# Altium PCB Плата печатная2.PcbDoc
Units mm, origin at the board's own origin, x right, y up, seen from the top; angles counter-clockwise.
Board outline 49.45 x 86.11 mm, 2 copper layers (Top Layer, Bottom Layer), stack 1.27 mm thick; 47 components, 42 nets, 151 pads, 22 vias.
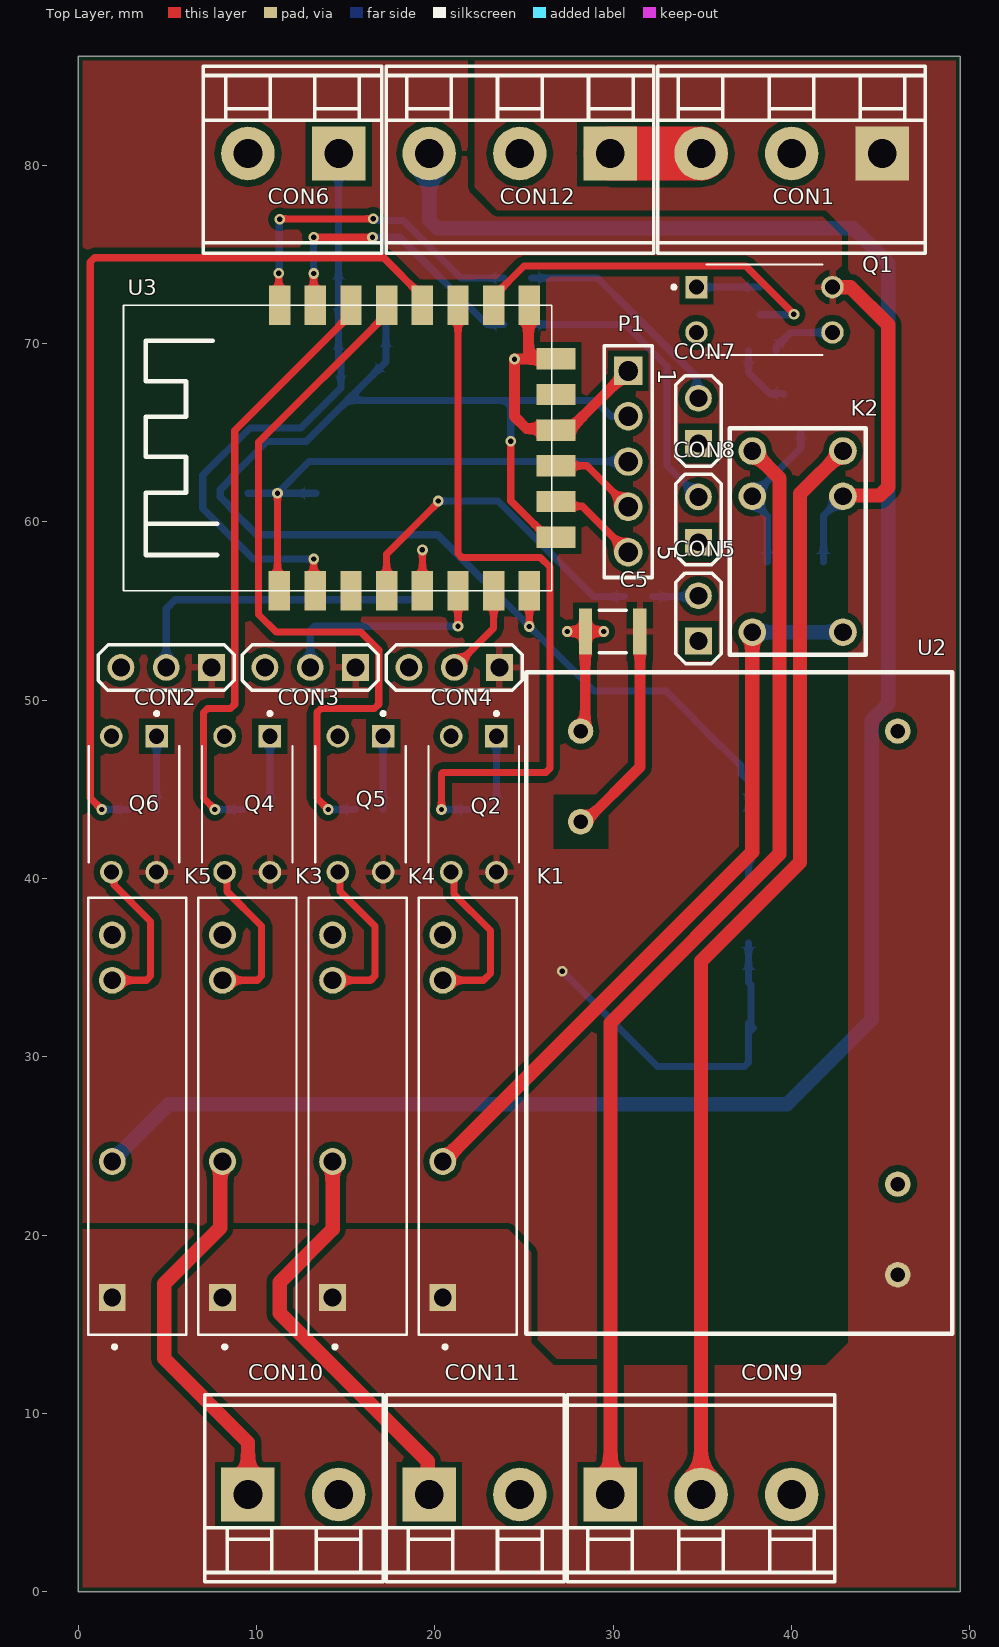
[diagram p0: Top Layer view]
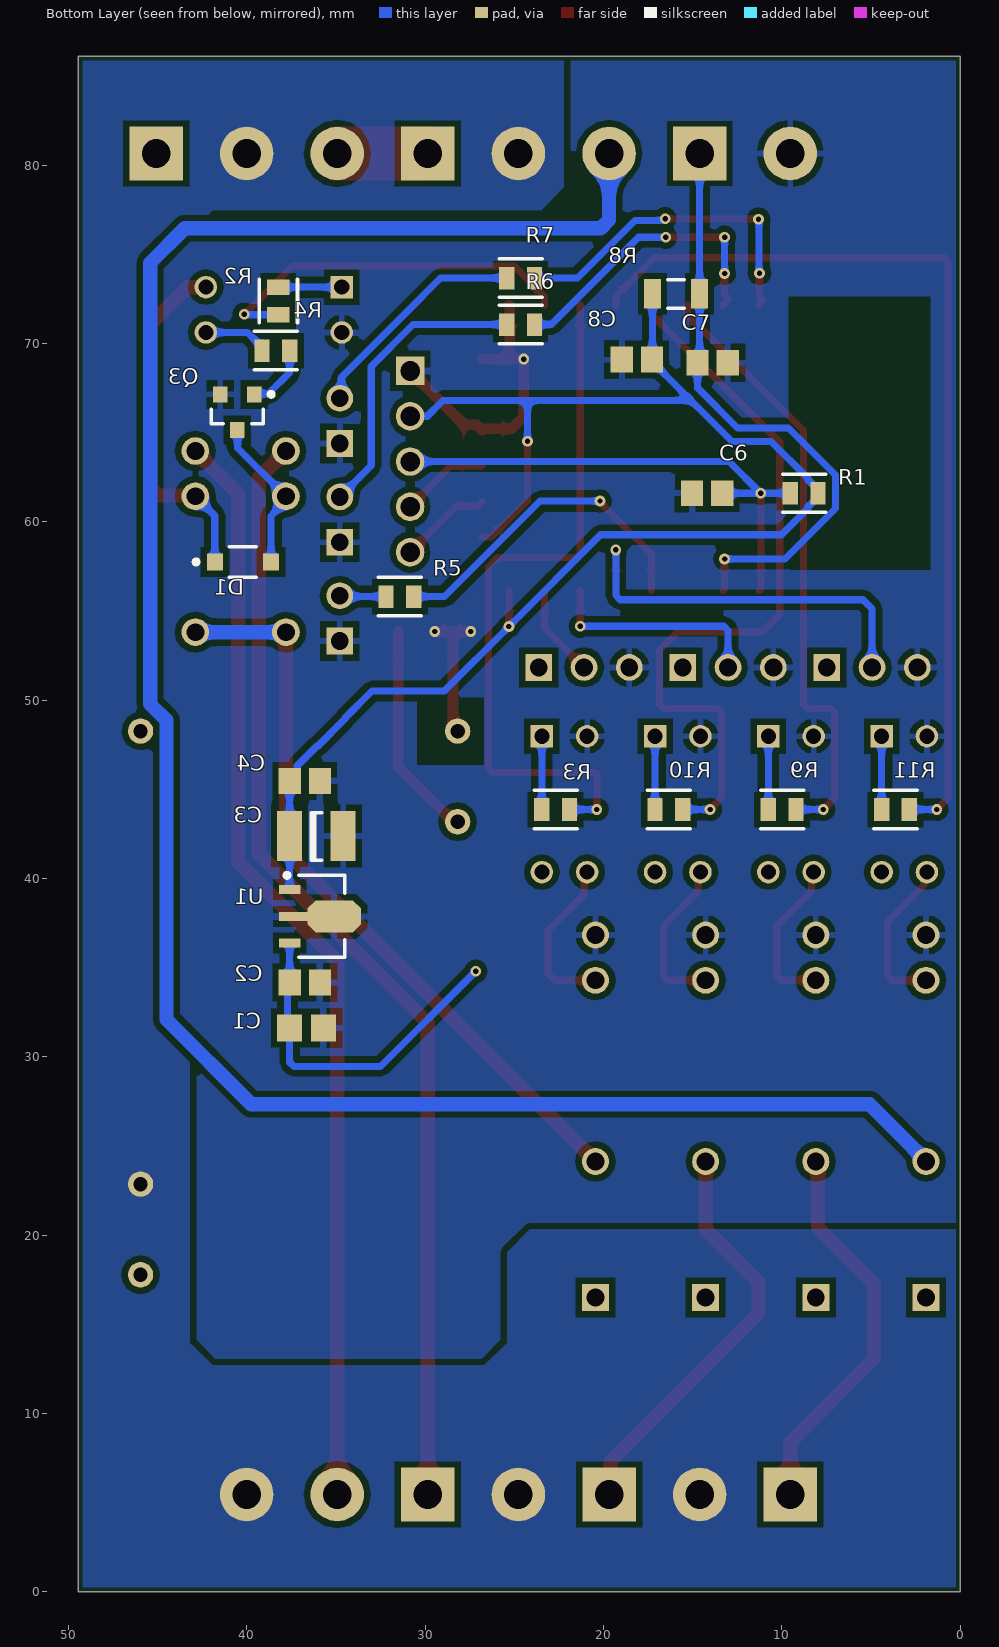
[diagram p1: Bottom Layer view, seen from below]
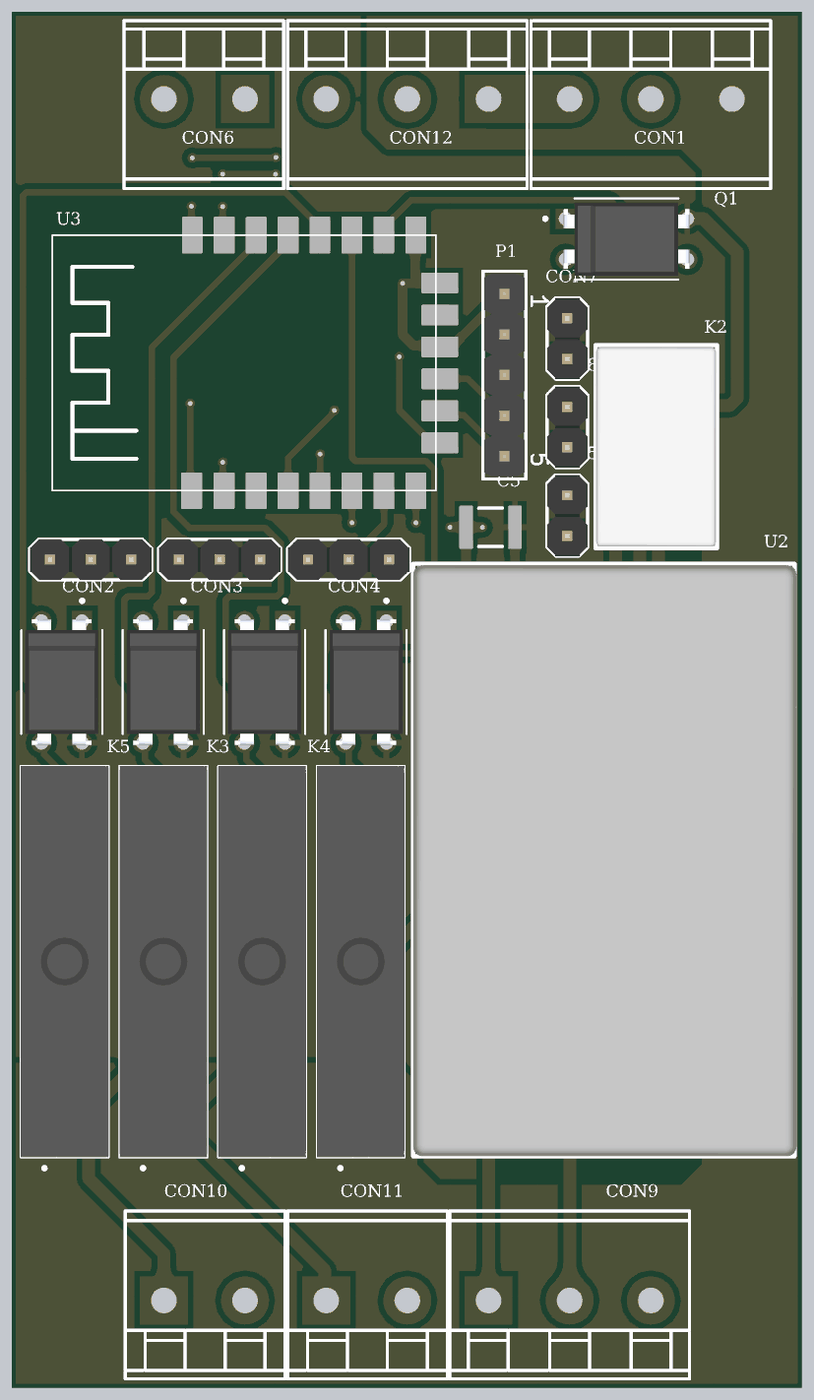
[diagram p2: 3D render of the assembled board from above, using the file's embedded part models]
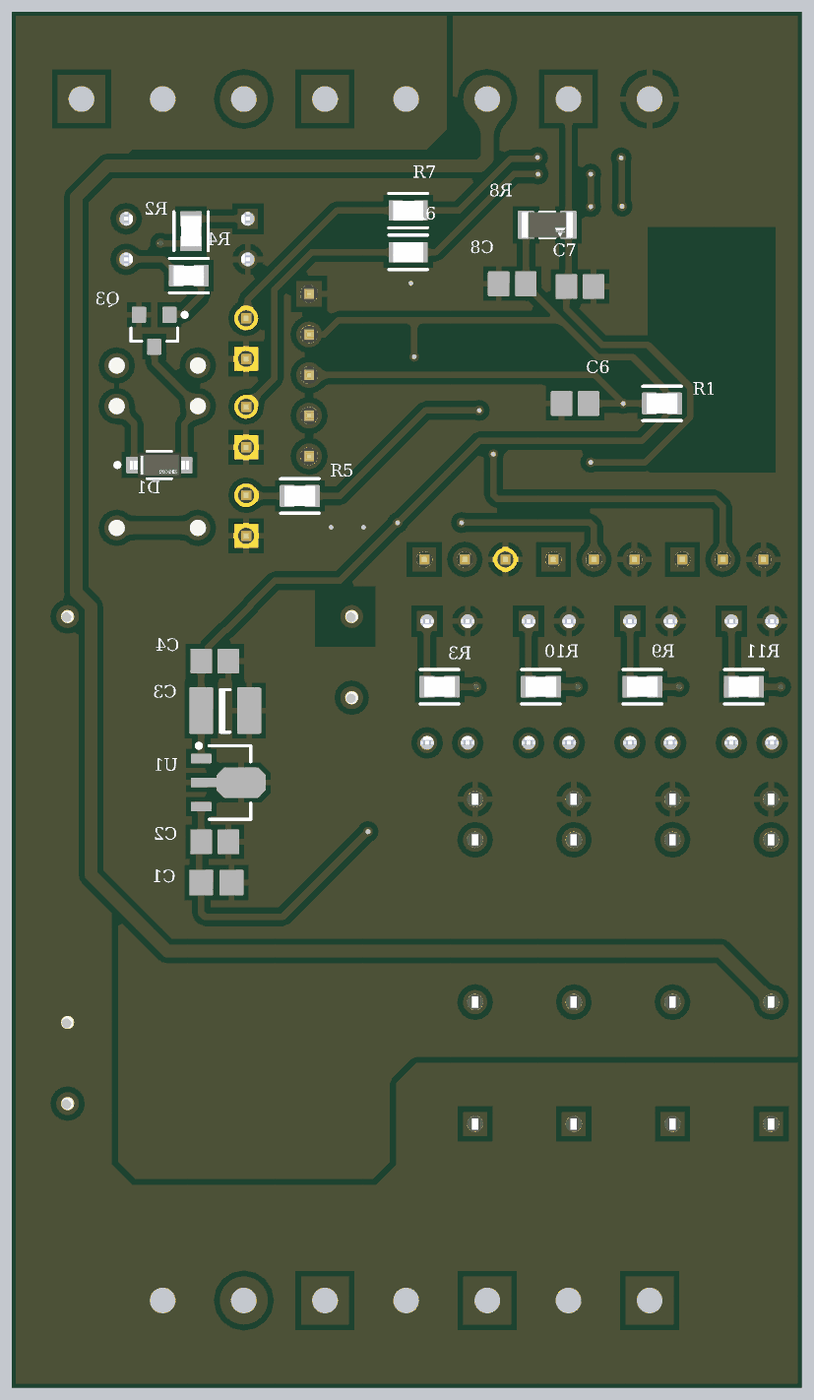
[diagram p3: 3D render of the assembled board from below, using the file's embedded part models]

## Layer stack, top to bottom
Top Solder: solder mask 0.0254, SM-001, Dk 4
Top Layer: signal copper 0.035
Dielectric 1: core 1.2, FR4, Dk 4.6
Bottom Layer: signal copper 0.035
Bottom Solder: solder mask 0.0254, SM-001, Dk 4

## Board outline
0,0 49.454,0 49.454,86.106 0,86.106

## Design rules (kind name [scope] priority, off if disabled: settings)
AcuteAngle [All] p1: minimum=3.50000000000000E+0001 checktracksonly=FALSE
BoardOutlineClearance "BoardOutlineClearance 1" [All] p1: gap=0.25 ignorepadtopadclearanceinfootprint=FALSE except(0: Arc-SplitContinuation Track-SplitContinuation SMDPad-SplitContinuation THPad-SplitContinuation Via-SplitContinuation Fill-SplitContinuation Poly-SplitContinuation Region-SplitContinuation Text-SplitContinuation) // Milling
BoardOutlineClearance "BoardOutlineClearance 2" [All] p2: gap=0.4 ignorepadtopadclearanceinfootprint=FALSE except(0: Arc-SplitContinuation Track-SplitContinuation SMDPad-SplitContinuation THPad-SplitContinuation Via-SplitContinuation Fill-SplitContinuation Poly-SplitContinuation Region-SplitContinuation Text-SplitContinuation) // V-Cut
Clearance "Clearance 3 Oz" [All] p1: gap=0.35 ignorepadtopadclearanceinfootprint=FALSE except(0.25: Arc-Hole Track-Hole SMDPad-Hole THPad-Hole Via-Hole Fill-Hole Poly-Hole Region-Hole Text-Hole)
Clearance "Clearance 2 Oz" [All] p2: gap=0.3 ignorepadtopadclearanceinfootprint=FALSE except(0.25: Arc-Hole Track-Hole SMDPad-Hole THPad-Hole Via-Hole Fill-Hole Poly-Hole Region-Hole Text-Hole)
Clearance "Clearance-1 1 Oz" [All] p3: gap=0.2 ignorepadtopadclearanceinfootprint=FALSE except(0.25: Arc-Hole Track-Hole SMDPad-Hole THPad-Hole Via-Hole Fill-Hole Poly-Hole Region-Hole Text-Hole) // Standart
Clearance "Clearance-2 1 Oz" [All] p4: gap=0.15 ignorepadtopadclearanceinfootprint=FALSE except(0.2: Arc-Fill Arc-Poly Track-Fill Track-Poly SMDPad-Fill SMDPad-Poly THPad-Fill THPad-Poly Via-Fill Via-Poly Fill-Fill Fill-Poly Poly-Poly; 0.25: Arc-Hole Track-Hole SMDPad-Hole THPad-Hole Via-Hole Fill-Hole Poly-Hole Region-Hole Text-Hole) // Advance
Clearance "Clearance-1 1/2 Oz" [All] p5: gap=0.125 ignorepadtopadclearanceinfootprint=FALSE except(0.2: Arc-Fill Arc-Poly Track-Fill Track-Poly SMDPad-SMDPad SMDPad-Fill SMDPad-Poly THPad-Fill THPad-Poly Via-Fill Via-Poly Fill-Fill Fill-Poly Poly-Poly Poly-Region Poly-Text; 0.25: Arc-Hole Track-Hole SMDPad-Hole THPad-Hole Via-Hole Fill-Hole Poly-Hole Region-Hole Text-Hole) // Standart
Clearance "Clearance-2 1/2 Oz" [All] p6: gap=0.1 ignorepadtopadclearanceinfootprint=FALSE except(0.15: Arc-Fill Arc-Poly Track-Fill Track-Poly SMDPad-SMDPad SMDPad-Fill SMDPad-Poly THPad-Fill THPad-Poly Via-Fill Via-Poly Fill-Fill Fill-Poly Poly-Poly Poly-Region Poly-Text; 0.25: Arc-Hole Track-Hole SMDPad-Hole THPad-Hole Via-Hole Fill-Hole Poly-Hole Region-Hole Text-Hole) // Advance
DiffPairsRouting "DiffPairsRouting 1 Oz" [All] p1: maxlimit=0.254 minlimit=0.2 mostfreqgap=0.254 toplayer_minwidth=0.2 toplayer_maxwidth=0.381 toplayer_prefwidth=0.381 bottomlayer_minwidth=0.2 bottomlayer_maxwidth=0.381 bottomlayer_prefwidth=0.381 maxuncoupledlength=12.7
DiffPairsRouting "DiffPairsRouting 1/2 Oz" [All] p2: maxlimit=0.254 minlimit=0.1 mostfreqgap=0.254 toplayer_minwidth=0.1 toplayer_maxwidth=0.381 toplayer_prefwidth=0.381 bottomlayer_minwidth=0.1 bottomlayer_maxwidth=0.381 bottomlayer_prefwidth=0.381 maxuncoupledlength=12.7
HoleSize "Minimum HoleSize" [IsPad] p1: absolutevalues=TRUE maxlimit=5.9 minlimit=0.6 maxpercent=80.000 minpercent=20.000
HoleSize "Minimum HoleSize VIA 1" [IsVia] p2: absolutevalues=TRUE maxlimit=5.9 minlimit=0.3 maxpercent=80.000 minpercent=20.000 // Standart
HoleSize "Minimum HoleSize VIA 2" [IsVia] p3: absolutevalues=TRUE maxlimit=5.9 minlimit=0.2 maxpercent=80.000 minpercent=20.000 // Advance
HoleToHoleClearance Hole2HoleClearance [All] p1: gap=0.25 allowstackedmicrovias=FALSE
MinimumAnnularRing "Minimum AR VIA Standart" [IsVia] p1: minimumring=0.15
MinimumAnnularRing "Minimum AR PAD Standart" [IsPAD] p2: minimumring=0.2
MinimumAnnularRing "Minimum AR VIA Advance" [IsVia] p3: minimumring=0.1
MinimumAnnularRing "Minimum AR PAD Advance" [IsPAD] p4: minimumring=0.15
MinimumSolderMaskSliver "SolderMask Bridge Standart" [All] p1: minsoldermaskwidth=0.15 // All Masks
MinimumSolderMaskSliver "SolderMask Bridge Advance" [All] p2: minsoldermaskwidth=0.1 // Mask LDI
PasteMaskExpansion [All] p1: expansion=0.05
PlaneClearance "PlaneClearance 3 Oz" [All] p1: clearance=0.35
PlaneClearance "PlaneClearance 2 Oz" [All] p2: clearance=0.3
PlaneClearance "PlaneClearance 1 Oz" [All] p3: clearance=0.2
PlaneClearance "PlaneClearance-1 1/2 Oz" [All] p4: clearance=0.2 // Standart
PlaneClearance "PlaneClearance-2 1/2 Oz" [All] p5: clearance=0.15 // Advance
PlaneConnect "TermalConnect 3 Oz" [All] p1: planeconnectstyle=Relief reliefexpansion=0.2 reliefentries=4 reliefconductorwidth=0.35 reliefairgap=0.35 // Standart
PlaneConnect "TermalConnect 2 Oz" [All] p2: planeconnectstyle=Relief reliefexpansion=0.2 reliefentries=4 reliefconductorwidth=0.3 reliefairgap=0.3 // Standart
PlaneConnect "TermalConnect-1 1 Oz" [All] p3: planeconnectstyle=Relief reliefexpansion=0.2 reliefentries=4 reliefconductorwidth=0.2 reliefairgap=0.2 // Standart
PlaneConnect "TermalConnect-2 1 Oz" [All] p4: pad.planeconnectstyle=Relief pad.reliefexpansion=0.15 pad.reliefentries=4 pad.reliefconductorwidth=0.2 pad.reliefairgap=0.2 via.planeconnectstyle=Direct via.reliefexpansion=0.15 via.reliefentries=4 via.reliefconductorwidth=0.15 via.reliefairgap=0.15 // Advance
PlaneConnect "TermalConnect-1 1/2 Oz" [All] p5: planeconnectstyle=Relief reliefexpansion=0.2 reliefentries=4 reliefconductorwidth=0.2 reliefairgap=0.2 // Standart
PlaneConnect "TermalConnect-2 1/2 Oz" [All] p6: pad.planeconnectstyle=Relief pad.reliefexpansion=0.15 pad.reliefentries=4 pad.reliefconductorwidth=0.15 pad.reliefairgap=0.15 via.planeconnectstyle=Direct via.reliefexpansion=0.15 via.reliefentries=4 via.reliefconductorwidth=0.15 via.reliefairgap=0.15 // Advance
PolygonConnect [InNet('220V(L)', '220V(N)')] p1: connectstyle=Direct reliefconductorwidth=0.254 reliefentries=4 polygonreliefangle="90 Angle" airgapwidth=0.254
PolygonConnect "PolygonConnect 3 Oz" [All] p2: thpad.connectstyle=Relief thpad.reliefconductorwidth=0.35 thpad.reliefentries=4 thpad.polygonreliefangle="90 Angle" thpad.airgapwidth=0.35 smdpad.connectstyle=Relief smdpad.reliefconductorwidth=0.35 smdpad.reliefentries=4 smdpad.polygonreliefangle="90 Angle" smdpad.airgapwidth=0.35 via.connectstyle=Direct via.reliefconductorwidth=0.254 via.reliefentries=4 via.polygonreliefangle="90 Angle" via.airgapwidth=0.254
PolygonConnect "PolygonConnect 2 Oz" [All] p3: thpad.connectstyle=Relief thpad.reliefconductorwidth=0.3 thpad.reliefentries=4 thpad.polygonreliefangle="90 Angle" thpad.airgapwidth=0.3 smdpad.connectstyle=Relief smdpad.reliefconductorwidth=0.3 smdpad.reliefentries=4 smdpad.polygonreliefangle="90 Angle" smdpad.airgapwidth=0.3 via.connectstyle=Direct via.reliefconductorwidth=0.254 via.reliefentries=4 via.polygonreliefangle="90 Angle" via.airgapwidth=0.254
PolygonConnect "PolygonConnect-1 1 Oz" [All] p4: thpad.connectstyle=Relief thpad.reliefconductorwidth=0.2 thpad.reliefentries=4 thpad.polygonreliefangle="90 Angle" thpad.airgapwidth=0.2 smdpad.connectstyle=Relief smdpad.reliefconductorwidth=0.2 smdpad.reliefentries=4 smdpad.polygonreliefangle="90 Angle" smdpad.airgapwidth=0.2 via.connectstyle=Direct via.reliefconductorwidth=0.254 via.reliefentries=4 via.polygonreliefangle="90 Angle" via.airgapwidth=0.254 // Standart
PolygonConnect "PolygonConnect-2 1 Oz" [All] p5: thpad.connectstyle=Relief thpad.reliefconductorwidth=0.15 thpad.reliefentries=4 thpad.polygonreliefangle="90 Angle" thpad.airgapwidth=0.15 smdpad.connectstyle=Relief smdpad.reliefconductorwidth=0.15 smdpad.reliefentries=4 smdpad.polygonreliefangle="90 Angle" smdpad.airgapwidth=0.15 via.connectstyle=Direct via.reliefconductorwidth=0.254 via.reliefentries=4 via.polygonreliefangle="90 Angle" via.airgapwidth=0.254 // Advance
PolygonConnect "PolygonConnect-1 1/2 Oz" [All] p6: thpad.connectstyle=Relief thpad.reliefconductorwidth=0.15 thpad.reliefentries=4 thpad.polygonreliefangle="90 Angle" thpad.airgapwidth=0.2 smdpad.connectstyle=Relief smdpad.reliefconductorwidth=0.2 smdpad.reliefentries=4 smdpad.polygonreliefangle="90 Angle" smdpad.airgapwidth=0.2 via.connectstyle=Direct via.reliefconductorwidth=0.254 via.reliefentries=4 via.polygonreliefangle="90 Angle" via.airgapwidth=0.254 // Standart
PolygonConnect "PolygonConnect-2 1/2 Oz" [All] p7: thpad.connectstyle=Relief thpad.reliefconductorwidth=0.125 thpad.reliefentries=4 thpad.polygonreliefangle="90 Angle" thpad.airgapwidth=0.15 smdpad.connectstyle=Relief smdpad.reliefconductorwidth=0.125 smdpad.reliefentries=4 smdpad.polygonreliefangle="90 Angle" smdpad.airgapwidth=0.15 via.connectstyle=Direct via.reliefconductorwidth=0.254 via.reliefentries=4 via.polygonreliefangle="90 Angle" via.airgapwidth=0.254 // Advance
RoutingCorners [All] p1 off: cornerstyle=45-Degree minsetback=2.54 maxsetback=2.54
RoutingVias [All] p1: holewidth=0.3 width=0.6 viastyle="Through Hole" minholewidth=0.2 minwidth=0.4 maxholewidth=5.9 maxwidth=6.4
SilkToSilkClearance Silk2SilkClearance [All] p1 off: silktosilkclearance=0.15
SilkToSolderMaskClearance Silk2SolderMaskClearance [IsPad] p1 off: minsilkscreentomaskgap=0.15 clearancetoexposedcopper=TRUE
SolderMaskExpansion SolderMaskExpansion-1 [All] p1: expansion=0.05 istentingtop=TRUE // Standart
UnRoutedNet [All] p1: checkbadconnections=TRUE
Width "Width 3 Oz" [All] p1: maxlimit=10 minlimit=0.35 preferedwidth=0.4 checkconnectedcopper=TRUE
Width "Width 2 Oz" [All] p2: maxlimit=10 minlimit=0.3 preferedwidth=0.35 minimp=50.000000 maximp=50.000000 favimp=50.000000 checkconnectedcopper=TRUE
Width "Width 1 Oz" [All] p3: maxlimit=10 minlimit=0.15 preferedwidth=0.2 checkconnectedcopper=TRUE
Width "Width 1/2 Oz" [All] p4: maxlimit=10 minlimit=0.1 preferedwidth=0.125 checkconnectedcopper=TRUE
19 further rules are at their usual default settings.

## Components (designator, comment, footprint, x,y, rotation, side; value= is the part's Value field where it differs from the comment)
C1 "10uF" CAPC2013X135X45ML10T25 36.642,31.614 r0 bottom
C2 "0.1uF" CAPC2013X140X45NL15T25 36.742,34.169 r0 bottom
C3 "1uF" TANTAL_B 36.092,42.377 r0 bottom
C4 "0.1uF" CAPC2013X140X45NL15T25 36.742,45.466 r0 bottom
C5 "47uF" MURA-1210_H_2.7_L 29.973,53.848 r0 top
C6 "0.1uF" CAPC2013X140X45NL15T25 14.185,61.595 r180 bottom
C7 "0.1uF" CAPC2013X140X45NL15T25 13.882,68.912 r0 bottom
C8 "0.1uF" CAPC2013X140X45NL15T25 18.122,69.088 r180 bottom
CON1 "DG129-5.08-3" DG129-5.08-3 40.005,80.645 r180 top
CON2 "PLS-03" PLS-03#1 4.941,51.831 r180 top
CON3 "PLS-03" PLS-03#1 13.015,51.831 r180 top
CON4 "PLS-03" PLS-03#2 21.089,51.831 r180 top
CON5 "PLS-02" PLS-02 34.78,54.583 r90 top
CON6 "DG129-5.08-2" DG129-5.08-2 9.525,80.645 r180 top
CON7 "PLS-02" PLS-02 34.78,65.652 r90 top
CON8 "PLS-02" PLS-02 34.78,60.117 r90 top
CON9 "DG129-5.08-3" DG129-5.08-3 34.925,5.461 r0 top
CON10 "DG129-5.08-2" DG129-5.08-2 14.605,5.461 r0 top
CON11 "DG129-5.08-2" DG129-5.08-2 24.765,5.461 r0 top
CON12 "DG129-5.08-3" DG129-5.08-3 24.765,80.645 r180 top
D1 "1N4148W-13-F" FP-SOD123-MFG 40.214,57.745 r180 bottom value=2pF
K1 "G3MB-202PDC5" RELAY_G3MB-202PDC5 21.847,26.67 r90 top
K2 "NRP-03K-C-05D-H" NRP-03K-C-05D-H 37.801,63.968 r270 top
K3 "G3MB-202PDC5" RELAY_G3MB-202PDC5 9.493,26.67 r90 top
K4 "G3MB-202PDC5" RELAY_G3MB-202PDC5 15.67,26.67 r90 top
K5 "G3MB-202PDC5" RELAY_G3MB-202PDC5 3.315,26.67 r90 top
P1 "61300511121" 61300511121 30.841,63.373 r270 top
Q1 "PC817C" DIP762W50P254L650H458Q4B 38.481,71.882 r0 top
Q2 "PC817C" DIP762W50P254L650H458Q4B 22.184,44.164 r270 top
Q3 "MMBT2222ALT3G" ONSC-SOT-23-3-318-08_V 40.529,66.143 r270 bottom
Q4 "PC817C" DIP762W50P254L650H458Q4B 9.484,44.164 r270 top
Q5 "PC817C" DIP762W50P254L650H458Q4B 15.834,44.164 r270 top
Q6 "PC817C" DIP762W50P254L650H458Q4B 3.134,44.164 r270 top
R1 "1k" FP-CR0805-IPC_C#1 8.748,61.595 r180 bottom
R2 "150" FP-CR0805-IPC_C#1 38.227,72.375 r90 bottom
R3 "150" FP-CR0805-IPC_C#1 22.677,43.866 r0 bottom
R4 "300" FP-CR0805-IPC_C#1 38.369,69.596 r180 bottom
R5 "100" FP-CR0805-IPC_C#1 31.419,55.803 r0 bottom
R6 "100" FP-CR0805-IPC_C#2 24.638,71.056 r0 bottom
R7 "100" FP-CR0805-IPC_C#2 24.638,73.66 r180 bottom
R8 "47k" FP-CRCW1206-e3-IPC_C 15.931,72.771 r180 bottom
R9 "150" FP-CR0805-IPC_C#1 9.977,43.866 r0 bottom
R10 "150" FP-CR0805-IPC_C#1 16.327,43.866 r0 bottom
R11 "150" FP-CR0805-IPC_C#1 3.627,43.866 r0 bottom
U1 "L78L33ABUTR" SOT-89_L 35.892,37.873 r180 bottom
U2 "IRM-03-5" footprint_IRM-03-5 45.954,17.78 r90 top
U3 "ZS3L" zs3l 19.05,64.135 r90 top

## Footprints (in the part's own frame and the unit in brackets; to place one, negate y for a bottom-side part, rotate by r counter-clockwise, add the part's x,y. Pads: shape width x height; smd on the part's side, far side on the other; paste and mask are expansions set on the pad)
61300511121 [mm] "Pin Header, pitch 2.54 mm, THT, Vertical, single row, 5p"
  rect 1.6x1.6 hole 1.1: 1(-5.08,0)
  round 1.6 hole 1.1: 2(-2.54,0) 3(0,0) 4(2.54,0) 5(5.08,0)
  silkscreen extent -6.5,-1.35 6.5,1.35, body extent -6.35,-1.27 6.35,1.27, height 8.57
CAPC2013X135X45ML10T25 [mm] "Chip Capacitor, 2-Leads, Body 2.10x1.35mm, IPC Low Density"
  rect 1.4x1.5 smd: 1(-0.95,0) 2(0.95,0)
  body extent -1.05,-0.67 1.05,0.67, height 1.35
CAPC2013X140X45NL15T25 [mm] "Chip Capacitor, 2-Leads, Body 2.00x1.25mm, IPC Medium Density"
  rect 1.25x1.45 smd: 1(-0.85,0) 2(0.85,0)
  body extent -1.08,-0.7 1.07,0.7, height 1.4
DG129-5.08-2 [mm]
  rect 3x3 hole 1.6: 1(-5.08,0)
  round 3 hole 1.6: 2(0,0)
  silkscreen extent -7.5,-4.9 2.5,5.6, body extent -8.23,-5.25 2.53,6.1, height 18
DG129-5.08-3 [mm]
  rect 3x3 hole 1.6: 1(-5.08,0)
  round 3 hole 1.6: 2(0,0) 3(5.08,0)
  silkscreen extent -7.5,-4.9 7.5,5.6, body extent -8.15,-5.33 7.69,6.03, height 18
DIP762W50P254L650H458Q4B [mm]
  rect 1.26x1.26 hole 0.85: 1(-3.81,1.27)
  round 1.26 hole 0.85: 2(-3.81,-1.27) 3(3.81,-1.27) 4(3.81,1.27)
  silkscreen extent -5.18,-2.54 3.25,2.54, body extent -3.94,-2.29 3.94,2.29, height 4.8
footprint_IRM-03-5 [mil]
  round 56 hole 31.5: +V(1000,700) -V(1200,700) AC/L(0,0) AC/N(200,0) NC(1200,0)
  silkscreen extent -130,-120 1330,820, body extent -130,-125 1327,820, height 591
FP-CR0805-IPC_C#1 [mm]
  rect 0.858x1.262 smd: 1(-0.777,0) 2(0.777,0)
  silkscreen extent -1.21,-1.07 1.21,1.07, body extent -1,-0.63 1,0.63, height 0.6
FP-CR0805-IPC_C#2 [mm]
  rect 0.858x1.262 smd paste+0 mask+0: 1(-0.777,0) 2(0.777,0)
  silkscreen extent -1.21,-1.07 1.21,1.07, body extent -1,-0.63 1,0.63, height 0.6
FP-CRCW1206-e3-IPC_C [mm]
  rect 0.956x1.658 smd: 1(-1.326,0) 2(1.326,0)
  silkscreen extent -0.47,-0.8 0.47,0.8, body extent -1.6,-0.8 1.6,0.8, height 0.6
FP-SOD123-MFG [mm]
  rect 0.9x0.95 smd: 1(-1.575,0) 2(1.575,0)
  silkscreen extent -2.75,-0.85 0.75,0.85, body extent -1.85,-0.77 1.85,0.77, height 1.45
MURA-1210_H_2.7_L [mm] "Chip Capacitor, 2-Leads, Body 3.5x2.7mm, IPC High Density"
  rect 0.75x2.6 smd: 1(-1.525,0) 2(1.525,0)
  silkscreen extent -0.75,-1.2 0.75,1.2, body extent -1.75,-1.35 1.75,1.35, height 2.7
NRP-03K-C-05D-H [mm]
  round 1.55 hole 1: 1(2.54,5.08) 2(2.54,0) 3(0,0) 4(10.16,5.08) 5(10.16,0) 6(0,5.08)
  silkscreen extent -1.27,-1.27 11.43,6.35, body extent -1.17,-1.22 11.33,6.28, height 10
ONSC-SOT-23-3-318-08_V [mm] "SOT23, 3-Leads, Body 2.92x1.3mm, Pitch 0.95mm"
  rect 0.9x0.8 smd: 1(-1,0.95) 2(-1,-0.95) 3(1,0)
  silkscreen extent -1.12,-1.46 0.65,2.02, body extent -0.65,-1.46 0.65,1.46, height 1.11
PLS-02 [mm]
  rect 1.5x1.5 hole 1 paste-0.05 mask+0.05: 1(-1.27,0)
  round 1.5 hole 1 paste-0.05 mask+0.05: 2(1.27,0)
  silkscreen extent -2.54,-1.27 2.54,1.27, body extent -2.54,-1.27 2.54,1.27, height 8.6
PLS-03#1 [mm]
  rect 1.5x1.5 hole 1: 1(-2.54,0)
  round 1.5 hole 1: 2(0,0) 3(2.54,0)
  silkscreen extent -3.81,-1.27 3.81,1.27, body extent -3.81,-1.27 3.81,1.27, height 8.6
PLS-03#2 [mm]
  rect 1.5x1.5 hole 1 paste-0.05: 1(-2.54,0)
  round 1.5 hole 1 paste-0.05: 2(0,0)
  round 1.5 hole 1 paste-0.05 mask+0.05: 3(2.54,0)
  silkscreen extent -3.81,-1.27 3.81,1.27, body extent -3.81,-1.27 3.81,1.27, height 8.6
RELAY_G3MB-202PDC5 [mm]
  rect 1.508x1.508 hole 1: 1(-10.16,1.4)
  round 1.508 hole 1: 2(-2.54,1.4) 3(7.62,1.4) 4(10.16,1.4)
  silkscreen extent -13.03,-2.75 12.25,2.75, body extent -12.25,-2.75 12.25,2.75, height 20.5
SOT-89_L [mm] "SOT89, 3-Leads, Body 4.5x2.4 mm, Pitch 1.5mm, Lead Span 4.1mm, IPC High Density"
  rect 1.2x0.5 smd: 1(-1.7,1.5) 3(-1.7,-1.5)
  rect 1.6x0.5 smd: 2(-1.5,0)
  oct 3x1.8 smd: 2(0.8,0)
  silkscreen extent -1.98,-2.3 1.4,2.42, body extent -1.2,-2.3 1.4,2.3, height 1.6
TANTAL_B [mm]
  rect 1.4x2.8 smd: 1(1.5,0) 2(-1.5,0)
  silkscreen extent -0.3,-1.35 0.3,1.35, body extent -1.75,-1.4 1.75,1.4, height 1.9
zs3l [mm]
  rect 2.2x1.2 smd: 1(-8,7.782) 2(-8,5.75) 3(-8,3.75) 4(-8,1.75) 5(-8,-0.25) 6(-8,-2.25) 7(-8,-4.25) 8(-8,-6.25) 15(8,-6.25) 16(8,-4.25) 17(8,-2.25) 18(8,-0.25) 19(8,1.75) 20(8,3.75) 21(8,5.75) 22(8,7.75)
  rect 1.2x2.2 smd: 9(-5,-7.75) 10(-3,-7.75) 11(-1,-7.75) 12(1,-7.75) 13(3,-7.75) 14(5,-7.75)
  silkscreen extent -8,-7.5 8,16.5

## Part data
C1: library part CMP-2000-04946-1, "GRM21BR61E106KA73L / 10uF, +/- 10%, 25 V, 0805", Capacitance=1µF, Case Size/Dimension=0805, Dielectric=X7R, Manufacturer=Murata, Package Description="2-Pin Surface Mount Device, Body 2 x 1.25 mm", Package Reference=805, Rated Voltage=16V, Tolerance (%)=±10%, Datasheet URL=https://datasheet.ciiva.com/34302/1858922-34302874.pdf, Datasheet Version=Mar-08, Manufacturer URL=http://www.murata.com/
C2 C4 C6 C7 C8: library part CMP-2007-03401-1, "GRM21BR71H104K / 0.1 мкФ X7R 10% 50В 0805", Manufacturer=Murata, Part Number=GRM21BR71C475KA73L
C3: library part _TANTAL-B, "TANTAL TECAP1/50V B, 10%", Lifetime @ Temp=2000Hrs@105℃, Assembly type="Manual Part", Note="Tantalum Capacitors", Publisher="Catcatcat Electronics", website developer=http://catcatcat.d-lan.dp.ua/
C5: library part CMP-2000-06362-1, "Cap Ceramic, 47 uF, +/- 10%, -55 to 85 degC, 2-Pin SMD (1210), RoHS, Tape and Reel", Capacitance=47µF, Manufacturer=Murata, Operating Temperature=-55°C~85°C, Package / Case=1210(3225Metric), Package Description="2-Pin Surface Mount Device, Body 3.2 x 2.5 mm", Package Reference=1210, Ratings=-, Standard Package=1, Temperature Coefficient=X5R, Tolerance=±10%, Voltage - Rated=16V, Applications=GeneralPurpose, Catalog Drawings=GRMSeries_1210_2.5, Category=Capacitors, Datasheet URL=http://psearch.en.murata.com/capacitor/product/GRM32ER61C476KE15%23.pdf, Datasheet Version=04/2016, Family=CeramicCapacitors, Features=-, Height - Seated (Max)=-, Lead Spacing=-, Lead Style=-, Manufacturer URL=http://www.murata.com/, Mounting Technology=SurfaceMount, Mounting Type=SurfaceMount,MLCC, Online Catalog=GRMSeries, Other Names=490-6539-6, Packaging=Digi-Reel®, Product Training Modules=High-CapMultilayerCeramicCapacitors, Series=GRM, Size / Dimension="0.126\"Lx0.098\"W(3.20mmx2.50mm)", Thickness (Max)="0.106\"(2.70mm)", Voltage Rating DC=16V
CON1 CON6 CON9 CON10 CON11 CON12: Temp.Characteristic="-40C to +85C", Assembly type="Manual Part", Note=Connector, Publisher="Catcatcat Electronics", website developer=http://catcatcat.d-lan.dp.ua/
CON2 CON3 CON4 CON5 CON7 CON8: "2.54 mm", Temp.Characteristic="-40C to +85C", Assembly type="Manual Part", Note=Connector, Publisher="Catcatcat Electronics", website developer=http://catcatcat.d-lan.dp.ua/
D1: library part CMP-12791-000005-1, "DIODE GEN PURP 100V 150MA SOD123", Capacitance=2pF, Forward Current=300mA, Manufacturer="Diodes Inc.", Max Junction Temp=+150°C, Max Repetitive Reverse Voltage=100V, Max Surge Forward Current=1A, Package=SOD123, Peak Reverse Current=1uA, Temperature="-65°C to +150°C", Temperature Range Low=-65°C, Automotive=No, Category=Diode, ComponentLink2Description=Datasheet, ComponentLink2URL=https://upverter.com/datasheet/628e7d6fee5901eee6eef4567d1c3569f2cd3cde.pdf, Device Class L1="Discrete Semiconductors", Device Class L2=Diodes, Device Class L3="Rectifier Diodes", Digikey Description="DIODE GEN PURP 100V 150MA SOD123", Footprint Url=https://www.diodes.com/assets/Package-Files/SOD123.pdf, Height=1.45mm, Lead Free=Yes, Manufacturer Part Number=1N4148W-13-F, Mouser Description="1N4148W Series 2 A 100 V 400 mW Surface Mount Fast Switching Diode - SOD-123", Octopart=https://octopart.com/1n4148w-13-f-diodes+inc.-2359612, Reverse Voltage=100V, RoHS=TRUE, Standoff Height=0mm, Temperature Range High=+150°C
K1 K3 K4 K5: Package=None, Availability=Unavailable, MF="{'manufacturer': u'Omron Automation'}", MP=G3MB-202PDC5, Price=None
P1: library part CMP-1502-01068-1, "THT Vertical Pin Header WR-PHD, Pitch 2.54 mm, Single Row, 5 pins", Contact Resistance=20mOhm, Manufacturer="Wurth Elektronik", Operating Temperature=-40to105degC, Rated Current=3A, Withstanding Voltage=500VAC, Working Voltage=250VAC, Datasheet URL=https://katalog.we-online.de/em/datasheet/6130xx11121.pdf, Gender=Male, Manufacturer URL=http://www.we-online.de, Mounting Technology=THT, Orientation=Vertical, Package Reference=61300511121, Packaging=Bag, Part Number=61300511121, Pin Number=5, Pitch=2.54mm, Publisher=WurthElektronik, Row Number=Single
Q1 Q2 Q4 Q5 Q6: "High Density Mounting Type Photocoupler", Package=None, Availability=Unavailable, MF="{'manufacturer': u'Taiwan Semiconductor'}", MP=PC817C, Price=None
Q3: library part CMP-1048-00592-1, "General Purpose Transistor, NPN Silicon, 3-Pin SOT-23, Pb-Free, Tape and Reel", Manufacturer="On Semiconductor", ComponentLink1Description="Manufacturer URL", ComponentLink1URL=http://www.onsemi.com/, ComponentLink2Description=Datasheet, ComponentLink2URL=http://www.onsemi.cn/pub_link/Collateral/MMBT2222LT1-D.PDF, ComponentLink3Description="Package Specification", ComponentLink3URL=http://www.onsemi.cn/pub_link/Collateral/318-08.PDF, DatasheetVersion="Rev. 10", fT Min (MHz)=300, IC Continuous (A)=0.6, Mounting Technology="Surface Mount", PackageDescription="3-Pin Small Outline Transistor, Body 2.92 x 1.3 mm, Pitch 0.95 mm", PackageReference=SOT-23-3-318-08, PackageVersion="Rev. AP, 11/2009", Packing="Tape and Reel", PartNumber=MMBT2222ALT3G, Polarity=NPN, RoHS=TRUE
R1 R2 R3 R5 R6 R7 R9 R10 R11: library part CMP-07231-005922-1, "0805 150Ω 0.125W 1%", Case Code (Imperial)=0805, Case Code (Metric)=2012, Max Operating Temperature=155°C, Max Power Dissipation=125mW, Min Operating Temperature=-55°C, Package Quantity=1, Resistance=300kR, Temperature Coefficient=100ppm/°C, Tolerance=1%, Voltage Rating=150V, Case/Package=0805, Composition="Thick Film", Contact Plating=Tin, Depth=1.25mm, Features="Moisture Resistant", Height=0.024inch, Length=2mm, Military Standard=Not, Mount="Surface Mount", Number of Terminations=2, Packaging="Tape and Reel", Power Rating=125mW, Radiation Hardening=No, Termination=SMD/SMT, Thickness=508um, Width=0.049inch
R4: library part CMP-07231-005922-1, "0805 300kΩ 0.125W 1%", Case Code (Imperial)=0805, Case Code (Metric)=2012, Max Operating Temperature=155°C, Max Power Dissipation=125mW, Min Operating Temperature=-55°C, Package Quantity=1, Resistance=300kR, Temperature Coefficient=100ppm/°C, Tolerance=1%, Voltage Rating=150V, Case/Package=0805, Composition="Thick Film", Contact Plating=Tin, Depth=1.25mm, Features="Moisture Resistant", Height=0.024inch, Length=2mm, Military Standard=Not, Mount="Surface Mount", Number of Terminations=2, Packaging="Tape and Reel", Power Rating=125mW, Radiation Hardening=No, Termination=SMD/SMT, Thickness=508um, Width=0.049inch
R8: library part CMP-2003-04807-2, "10kΩ, 1%, 0.25W 1206", Case Code (Imperial)=1206, Case Code (Metric)=3216, Max Operating Temperature=155°C, Max Power Dissipation=250mW, Min Operating Temperature=-55°C, Package Quantity=10, Resistance=10kR, Temperature Coefficient=100ppm/°C, Tolerance=1%, Voltage Rating=200V, Case/Package=1206, Composition="Thick Film", Contact Plating=Tin, Depth=1.6mm, Features="Automotive AEC-Q200", Height=0.55mm, Lead Free="Lead Free", Length=3.2mm, Military Standard=Not, Number of Pins=2, Number of Terminations=2, Packaging="Tape and Reel", Power Rating=250mW, Radiation Hardening=No, Termination=SMD/SMT, Voltage Rating (DC)=200V, Weight=0.000353oz, Width=0.063inch, Working Voltage=200V
U1: library part CMP-0244-00410-1, "Positive Voltage Regulator, 3.3V, 4-Pin SOT-89, Tape and Reel https://www.chipdip.ru/product/l78l33abutr", ComponentLink1Description="Manufacturer URL", ComponentLink1URL=https://www.chipdip.ru/product/l78l33abutr, ComponentLink2Description=Datasheet, ComponentLink2URL=http://www.st.com/internet/com/TECHNICAL_RESOURCES/TECHNICAL_LITERATURE/DATASHEET/CD00000446.pdf, DatasheetVersion=1/02/2011, PackageDescription="3-Pin SOT-89 Package 1.5 mm Pitch, 4.1 mm Lead Span", PackageReference=SOT-89, PackageVersion=2011
U2: "AC-DC Single output Encapsulated power supply; Output 5Vdc at 0.6A; PCB mount, miniature size", Package=None, Availability=Unavailable, MF="{'manufacturer': u'MEAN WELL'}", MP=IRM-03-5, Price=None
U3: library part ZS3l, "ZS3L module on chip EFR32MG21A020F768IM32"

## Via types
v1: diameter 0.6, hole 0.3, Top Layer to Bottom Layer, tented both sides, 22 vias

## Nets (pads, with @x,y where several pads share a name; then routed paths per layer and width w, separated by ;. In a path a pad name is that pad's centre, name@x,y a point inside that pad or via, vN(x,y) a via of type N, cw(c..) or ccw(c..) an arc to the next point about the centre after c; other vN are vias at no path point)
220V(L): CON1.1 K1.1 K3.1 K4.1 K5.1 U2.AC/L
220V(N): CON1.2 CON9.3 CON10.2 CON11.2 CON12.2 U2.AC/N
+3.3V: C3.1 C4.2 C8.2 P1.2 R1.2 R8.1 U1.1 U3.8 U3.9 | length 85.5
  Top Layer w0.4: v1(24.257,64.516) 24.257,61.178 26.3,59.135 U3.9 ; v1(25.3,54.129) U3.8
  Bottom Layer w0.4: R8.1 17.257,69.103 C8.2 17.272,68.988 15.086,66.802 ; v1(24.257,64.516) 24.257,66.802 ; P1.2@30.079,65.913 29.877,65.913 28.988,66.802 24.257,66.802 ; U1.1 C3.1 C4.2 37.167,45.891 37.167,46.319 36.075,47.411 36.022,47.411 34.5,48.933 34.5,48.986 32.977,50.508 28.921,50.508 v1(25.3,54.129) 20.159,59.27 10.012,59.27 8.546,60.736 8.546,60.818 7.971,61.393 R1.2 7.971,61.797 8.546,62.372 8.546,62.454 10.599,64.507 12.791,64.507 15.086,66.802 ; 15.086,66.802 24.257,66.802
+5V: C1.2 C2.2 C5.2 CON2.1 CON3.1 CON4.1 D1.1 K2.1 Q1.4 Q2.4 Q4.4 Q5.4 Q6.4 U1.3 U2.+V | length 52.2
  Top Layer w0.6: U2.+V@28.428,43.18 31.498,46.25 C5.2
  Top Layer w0.8: Q1.4 43.307,73.152 45.415,71.044 45.415,61.937 44.947,61.468 42.921,61.468 K2.1
  Bottom Layer w0.4: v1(27.153,34.798) 27.158,34.798 32.492,29.464 37.358,29.464 37.592,29.698 C1.2 ; U1.3 C2.2 37.719,34.042 C1.2@37.719,31.889 ; D1.1 41.789,60.336 K2.1 ; C1.2 37.592,31.889 37.858,31.623 37.721,31.486 C1.2
ACT_EN_1: R9.1 U3.20 | length 34.2
  Top Layer w0.4: v1(7.671,43.866) 7.034,44.503 7.034,49.296 7.268,49.53 8.546,49.53 8.781,49.764 8.781,65.116 15.3,71.635 U3.20
  Bottom Layer w0.4: v1(7.671,43.866) R9.1
ACT_EN_2: R10.1 U3.19 | length 41.8
  Top Layer w0.4: v1(14.021,43.866) 13.384,44.503 13.384,49.296 13.618,49.53 16.62,49.53 16.855,49.764 16.855,52.808 15.855,53.808 11.117,53.808 10.118,54.807 10.118,64.453 17.3,71.635 U3.19
  Bottom Layer w0.4: v1(14.021,43.866) R10.1
GND_AC: CON1.3 CON12.1 | length 5.1
  Top Layer w3: CON12.1 CON1.3
GND_DC: C1.1 C2.1 C3.2 C4.1 C5.1 C6.1 C7.1 C8.1 CON2.3 CON3.3 CON4.3 CON5.1 CON6.2 CON7.1 CON8.1 K1.4 K3.4 K4.4 K5.4 P1.1 Q1.2 Q2.2 Q3.2 Q4.2 Q5.2 Q6.2 U1.2 U2.-V U3.12 U3.14 U3.15 | length 24.3
  Top Layer w0.4: U2.-V@28.428,48.26 U2.-V@28.438,48.27 ; C5.1@28.438,53.838 C5.1
  Top Layer w0.6: U3.15 25.257,72.092 25.257,69.106 ; U3.14 26.771,69.106 25.257,69.106 ; v1(27.432,53.848) C5.1 v1(29.464,53.848) ; U2.-V@28.438,48.27 C5.1@28.438,53.838 ; P1.1 27.823,65.435 27.1,65.435 U3.12 26.716,65.219 25.151,65.219 24.468,65.902 v1(24.468,69.118) 25.245,69.118 25.257,69.106
LED_1: R5.1 U3.4 | length 18.9
  Top Layer w0.4: U3.4 17.3,58.194 20.093,60.987 20.093,61.06 v1(20.193,61.16)
  Bottom Layer w0.4: v1(20.193,61.16) 23.549,61.16 28.906,55.803 R5.1
LED_2: R7.2 U3.22 | length 19
  Top Layer w0.4: v1@11.258,73.942 v1(11.251,73.935) 11.251,72.588 11.049,72.386 U3.22 ; v1(11.303,76.962) 11.319,76.978 16.526,76.978 v1(16.542,76.994)
  Bottom Layer w0.4: v1(11.251,73.935) 11.277,73.961 11.277,76.936 v1(11.303,76.962) ; v1(16.542,76.994) 16.596,76.994 16.696,76.894 18.229,76.894 21.463,73.66 R7.2
LED_3: R6.1 U3.21 | length 16.7
  Top Layer w0.4: v1(13.208,73.914) 13.208,72.735 12.954,72.481 U3.21 ; v1(13.208,75.946) v1(16.51,75.946)
  Bottom Layer w0.4: v1(13.208,73.914) v1(13.208,75.946) ; v1(16.51,75.946) 18.034,75.946 22.924,71.056 R6.1
MIXER_DIR: R2.1 U3.16 | length 21.1
  Top Layer w0.4: U3.16 23.3,72.635 24.997,74.332 37.428,74.332 v1(40.132,71.628)
  Bottom Layer w0.4: R2.1 38.234,71.606 40.11,71.606 v1(40.132,71.628)
MIXER_DO: R3.1 U3.17 | length 40.4
  Top Layer w0.4: v1(20.371,43.866) 20.371,45.873 20.438,45.94 26.216,45.94 26.45,46.174 26.45,57.463 25.928,57.985 21.534,57.985 21.3,58.219 U3.17
  Bottom Layer w0.4: v1(20.371,43.866) R3.1
NetCON5_2: CON5.2 R5.2 | length 2.6
  Bottom Layer w0.4: R5.2 CON5.2@34.729,55.803
  Bottom Layer w0.6: CON5.2@34.729,55.803 CON5.2
NetCON7_2: CON7.2 R7.1 | length 12.8
  Bottom Layer w0.4: R7.1 29.128,73.66 30.982,71.806 34.682,68.105 34.682,67.019 CON7.2
NetCON8_2: CON8.2 R6.2 | length 16.6
  Bottom Layer w0.4: R6.2 30.671,71.056 33.02,68.707 33.02,63.147 CON8.2
NetCON9_1: CON9.1 K2.3 | length 63.1
  Top Layer w0.8: CON9.1 29.845,31.902 39.326,41.382 39.326,62.443 K2.3
NetCON9_2: CON9.2 K2.6 | length 61.8
  Top Layer w0.8: CON9.2 34.925,35.355 40.476,40.906 40.476,61.563 K2.6
NetCON10_1: CON10.1 K3.2 | length 21.9
  Top Layer w0.8: K3.2@7.966,24.13 7.966,20.412 4.826,17.272 4.826,13.081 9.525,8.382 CON10.1
NetCON11_1: CON11.1 K4.2 | length 23.5
  Top Layer w0.8: K4.2 14.27,20.331 11.303,17.364 11.303,15.621 19.597,7.327 CON11.1@19.597,5.334
NetCON12_3: CON12.3 K5.2 | length 119.2
  Bottom Layer w0.8: K5.2 1.915,24.171 5.08,27.336 39.741,27.336 44.493,32.088 44.493,48.865 45.415,49.787 45.415,74.512 43.473,76.454 20.154,76.454 19.685,76.923 CON12.3
NetD1_2: D1.2 K2.2 Q3.3 | length 8.9
  Bottom Layer w0.4: D1.2 38.639,60.321 37.801,61.159 K2.2 40.513,64.14 40.513,65.127 Q3.3
NetK1_2: K1.2 K2.4 K2.5 | length 41.9
  Top Layer w0.8: K1.2@20.574,24.13 20.574,24.257 37.801,41.484 K2.5
  Bottom Layer w0.8: K2.5 K2.4
NetK1_3: K1.3 Q2.3 | length 9.3
  Top Layer w0.4: K1.3@20.574,34.29 22.733,34.29 23.114,34.671 23.114,37.084 21.079,39.119 21.079,40.19 Q2.3
NetK3_3: K3.3 Q4.3 | length 9.1
  Top Layer w0.4: K3.3@7.966,34.29 10.053,34.29 10.287,34.524 10.287,37.338 8.339,39.286 8.339,40.229 Q4.3
NetK4_3: K4.3 Q5.3 | length 9.2
  Top Layer w0.4: K4.3 16.403,34.29 16.637,34.524 16.637,37.338 14.689,39.286 14.689,40.229 Q5.3
NetK5_3: K5.3 Q6.3 | length 9.2
  Top Layer w0.4: K5.3@1.661,34.29 3.83,34.29 4.064,34.524 4.064,37.592 2.029,39.627 2.029,40.19 Q6.3
NetP1_4: P1.4 U3.11 | length 5
  Top Layer w0.4: U3.11 28.539,63.135 P1.4@30.857,60.817
NetP1_5: P1.5 U3.10 | length 5.2
  Top Layer w0.4: U3.10 27.067,60.868 28.266,60.868 P1.5
NetQ1_1: Q1.1 R2.2 | length 3.6
  Bottom Layer w0.4: Q1.1 R2.2
NetQ1_3: Q1.3 R4.1 | length 3.7
  Bottom Layer w0.4: R4.1 39.146,69.798 39.96,70.612 Q1.3
NetQ2_1: Q2.1 R3.2 | length 4.1
  Bottom Layer w0.4: R3.2 Q2.1
NetQ3_1: Q3.1 R4.2 | length 3.7
  Bottom Layer w0.4: R4.2 37.592,68.365 38.774,67.183 39.538,67.183 Q3.1
NetQ4_1: Q4.1 R9.2 | length 4.1
  Bottom Layer w0.4: R9.2 Q4.1
NetQ5_1: Q5.1 R10.2 | length 4.1
  Bottom Layer w0.4: R10.2 Q5.1
NetQ6_1: Q6.1 R11.2 | length 4.1
  Bottom Layer w0.4: R11.2 Q6.1
PUMP: R11.1 U3.18 | length 52.6
  Top Layer w0.4: v1(1.321,43.866) 0.684,44.503 0.684,74.569 0.918,74.803 17.132,74.803 19.3,72.635 U3.18
  Bottom Layer w0.4: v1(1.321,43.866) R11.1
RST: C6.2 P1.3 R1.1 U3.1 | length 28.9
  Top Layer w0.4: v1(11.176,61.595) 11.176,56.227 U3.1
  Bottom Layer w0.4: R1.1 v1(11.176,61.595) ; C6.2 v1(11.176,61.595) ; P1.3@30.079,63.373 12.954,63.373 v1(11.176,61.595)
T_MEAS: C7.2 CON6.1 R8.2 U3.2 | length 34
  Top Layer w0.4: v1(13.208,57.912) 13.208,56.227 U3.2
  Bottom Layer w0.4: v1(13.208,57.912) 9.816,57.912 6.992,60.736 6.992,62.618 9.631,65.257 12.48,65.257 14.732,67.509 C7.2 14.605,69.039 CON6.1
Touch_1: CON2.2 U3.5 | length 22.8
  Top Layer w0.4: U3.5 19.304,56.139 v1(19.304,58.42)
  Bottom Layer w0.4: CON2.2 4.941,55.125 5.441,55.626 19.07,55.626 19.304,55.86 v1(19.304,58.42)
Touch_2: CON3.2 U3.6 | length 12.5
  Top Layer w0.4: v1(21.3,54.138) U3.6
  Bottom Layer w0.4: CON3.2 13.015,53.904 13.249,54.138 v1(21.3,54.138)
Touch_3: CON4.2 U3.7 | length 5.2
  Top Layer w0.4: CON4.2 23.3,54.042 U3.7
pads on no net: U2.NC U3.3 U3.13

## Polygon pours and split planes (outlines as drawn)
+5V on Top Layer "Top Layer +5V" (solid, remove dead copper, pour order 7): 0,86.36 49.53,86.36 49.53,0 0,0
220V(L) on Top Layer "Top Layer-220L" (solid, remove dead copper, pour order 5): 22.225,86.36 49.53,86.36 49.53,0 0,0 0,20.32 24.13,20.32 25.4,19.05 25.4,13.97 26.67,12.7 41.91,12.7 43.18,13.97 43.18,76.2 41.91,77.47 23.495,77.47 22.225,78.74
no net on Top Layer "Top Layer-No Net" (solid, remove dead copper, pour order 2): 0,86.36
GND_DC on Bottom Layer "Bottom Layer-GND-DC" (solid, remove dead copper, pour order 8): 0,86.36 49.53,86.36 49.53,0 0,0
220V(N) on Bottom Layer "Bottom Layer-220N" (solid, remove dead copper, pour order 6): 22.225,86.36 49.53,86.36 49.53,0 0,0 0,20.32 24.13,20.32 25.4,19.05 25.4,13.97 26.67,12.7 41.91,12.7 43.18,13.97 43.18,76.2 41.91,77.47 23.495,77.47 22.225,78.74

## Other copper
Top Layer:
  pour cut-out: 8.382,52.578 8.382,53.848 1.016,53.848 1.016,52.451 1.143,52.578
  pour cut-out: 26.67,44.704 29.718,44.704 29.718,41.656 26.67,41.656
  pour cut-out: 26.67,50.165
Bottom Layer:
  pour cut-out: 1.651,57.277 1.651,72.644 9.652,72.644 9.652,65.839 6.431,62.618 6.431,60.736 9.525,57.642 9.525,57.277
  pour cut-out: 26.67,50.165 30.48,50.165 30.48,46.355 26.67,46.355

## Silkscreen, mask and mechanical layers (free items; w line width, h text height)
Board_Shape:
  the board outline again, w0.254

## Text inside footprints (layer, text, board x,y; h text height)
P1: Top Overlay "1" at 32.541,68.573 h1.02 r270; Top Overlay "5" at 32.541,58.673 h1.02 r270